# Altium PCB PCB1.PcbDoc
Units mm, origin at the board's own origin, x right, y up, seen from the top; angles counter-clockwise.
Board outline 56 x 70 mm, 2 copper layers (Top Layer, Bottom Layer); 10 components, 0 nets, 48 pads, 0 vias.
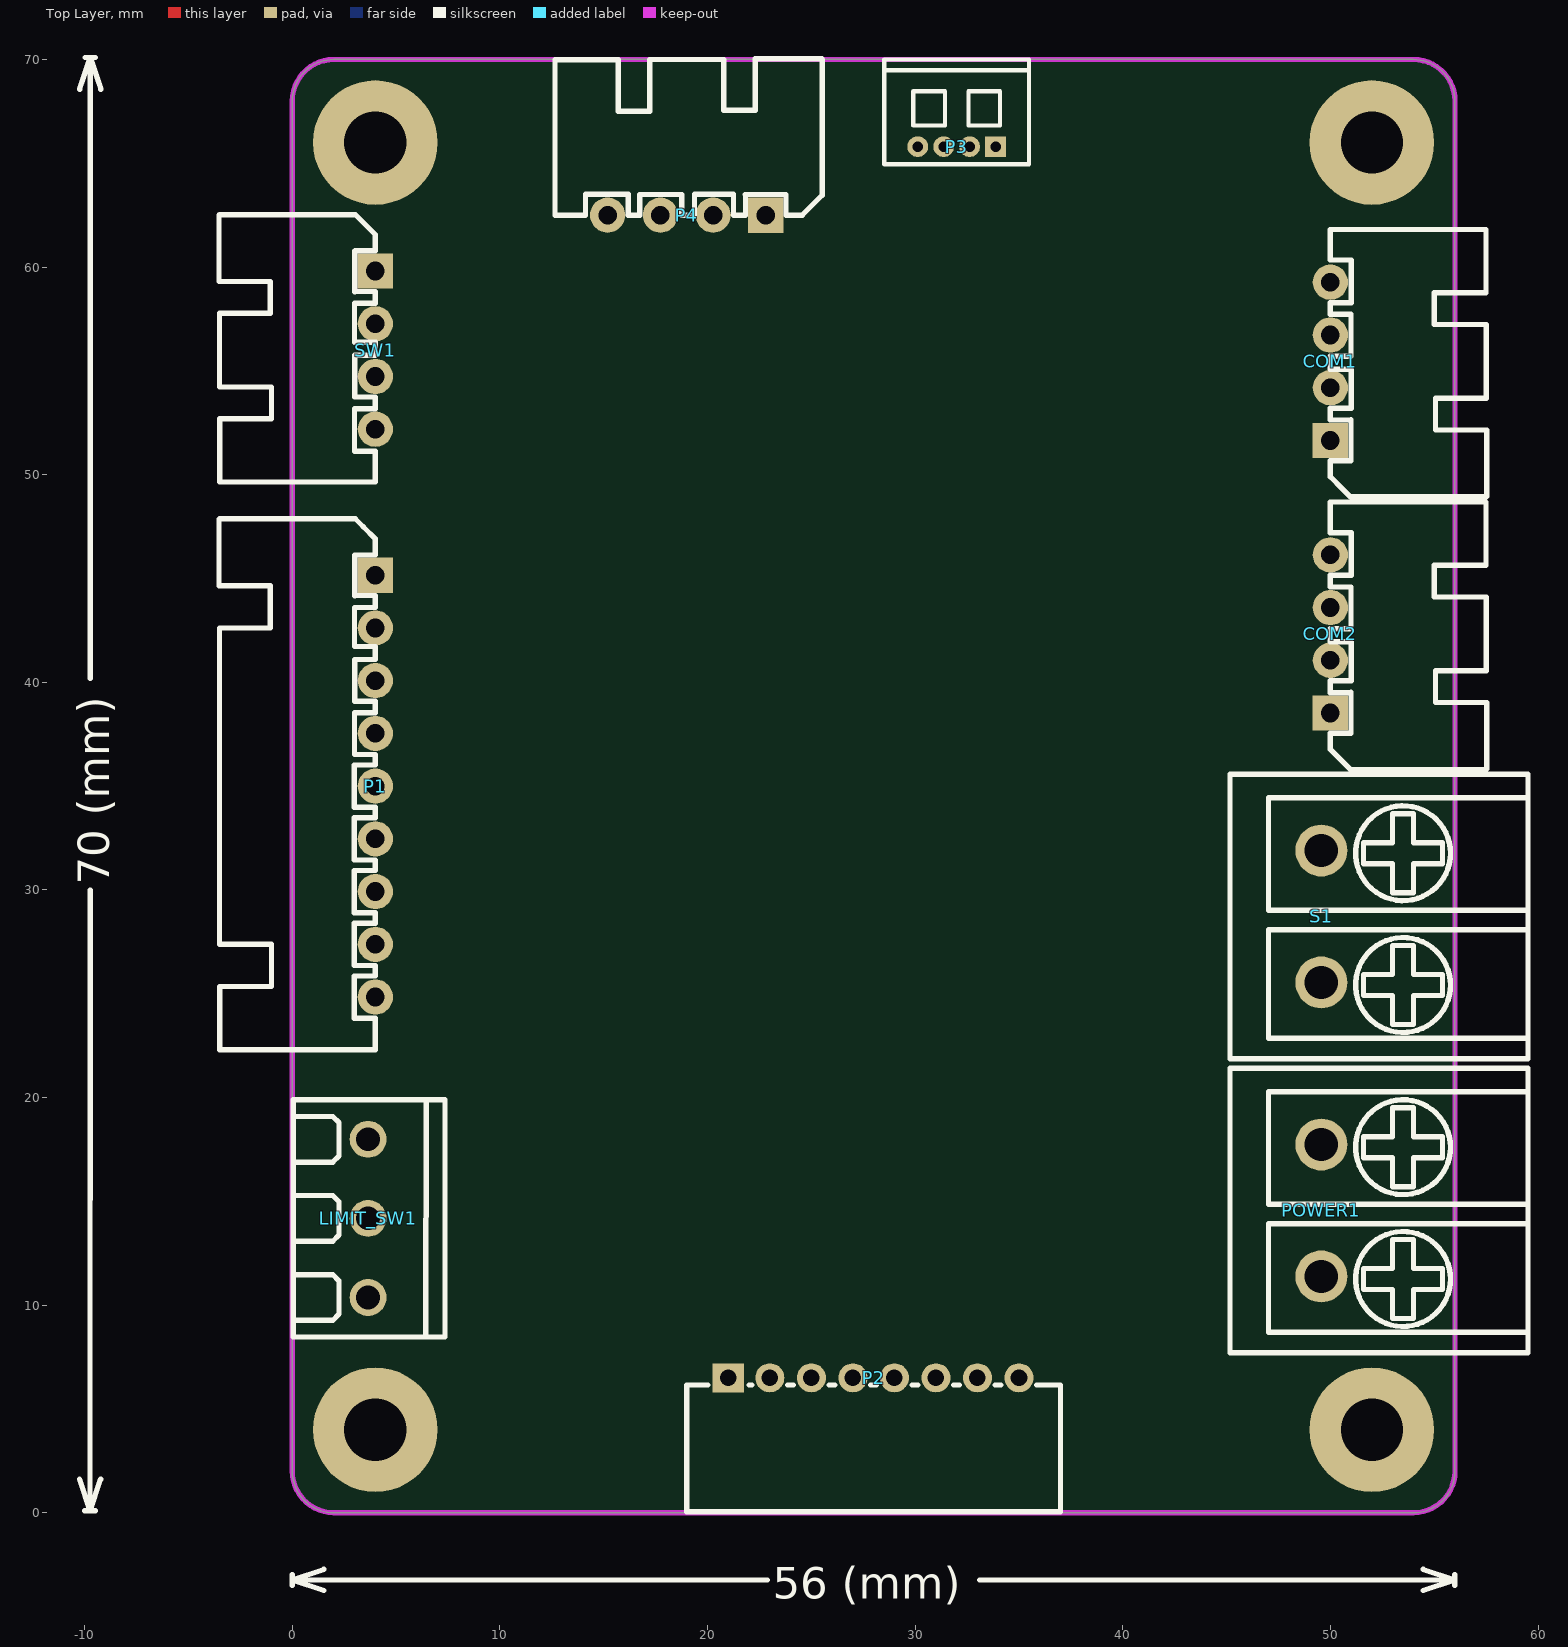
[diagram p0: Top Layer view]
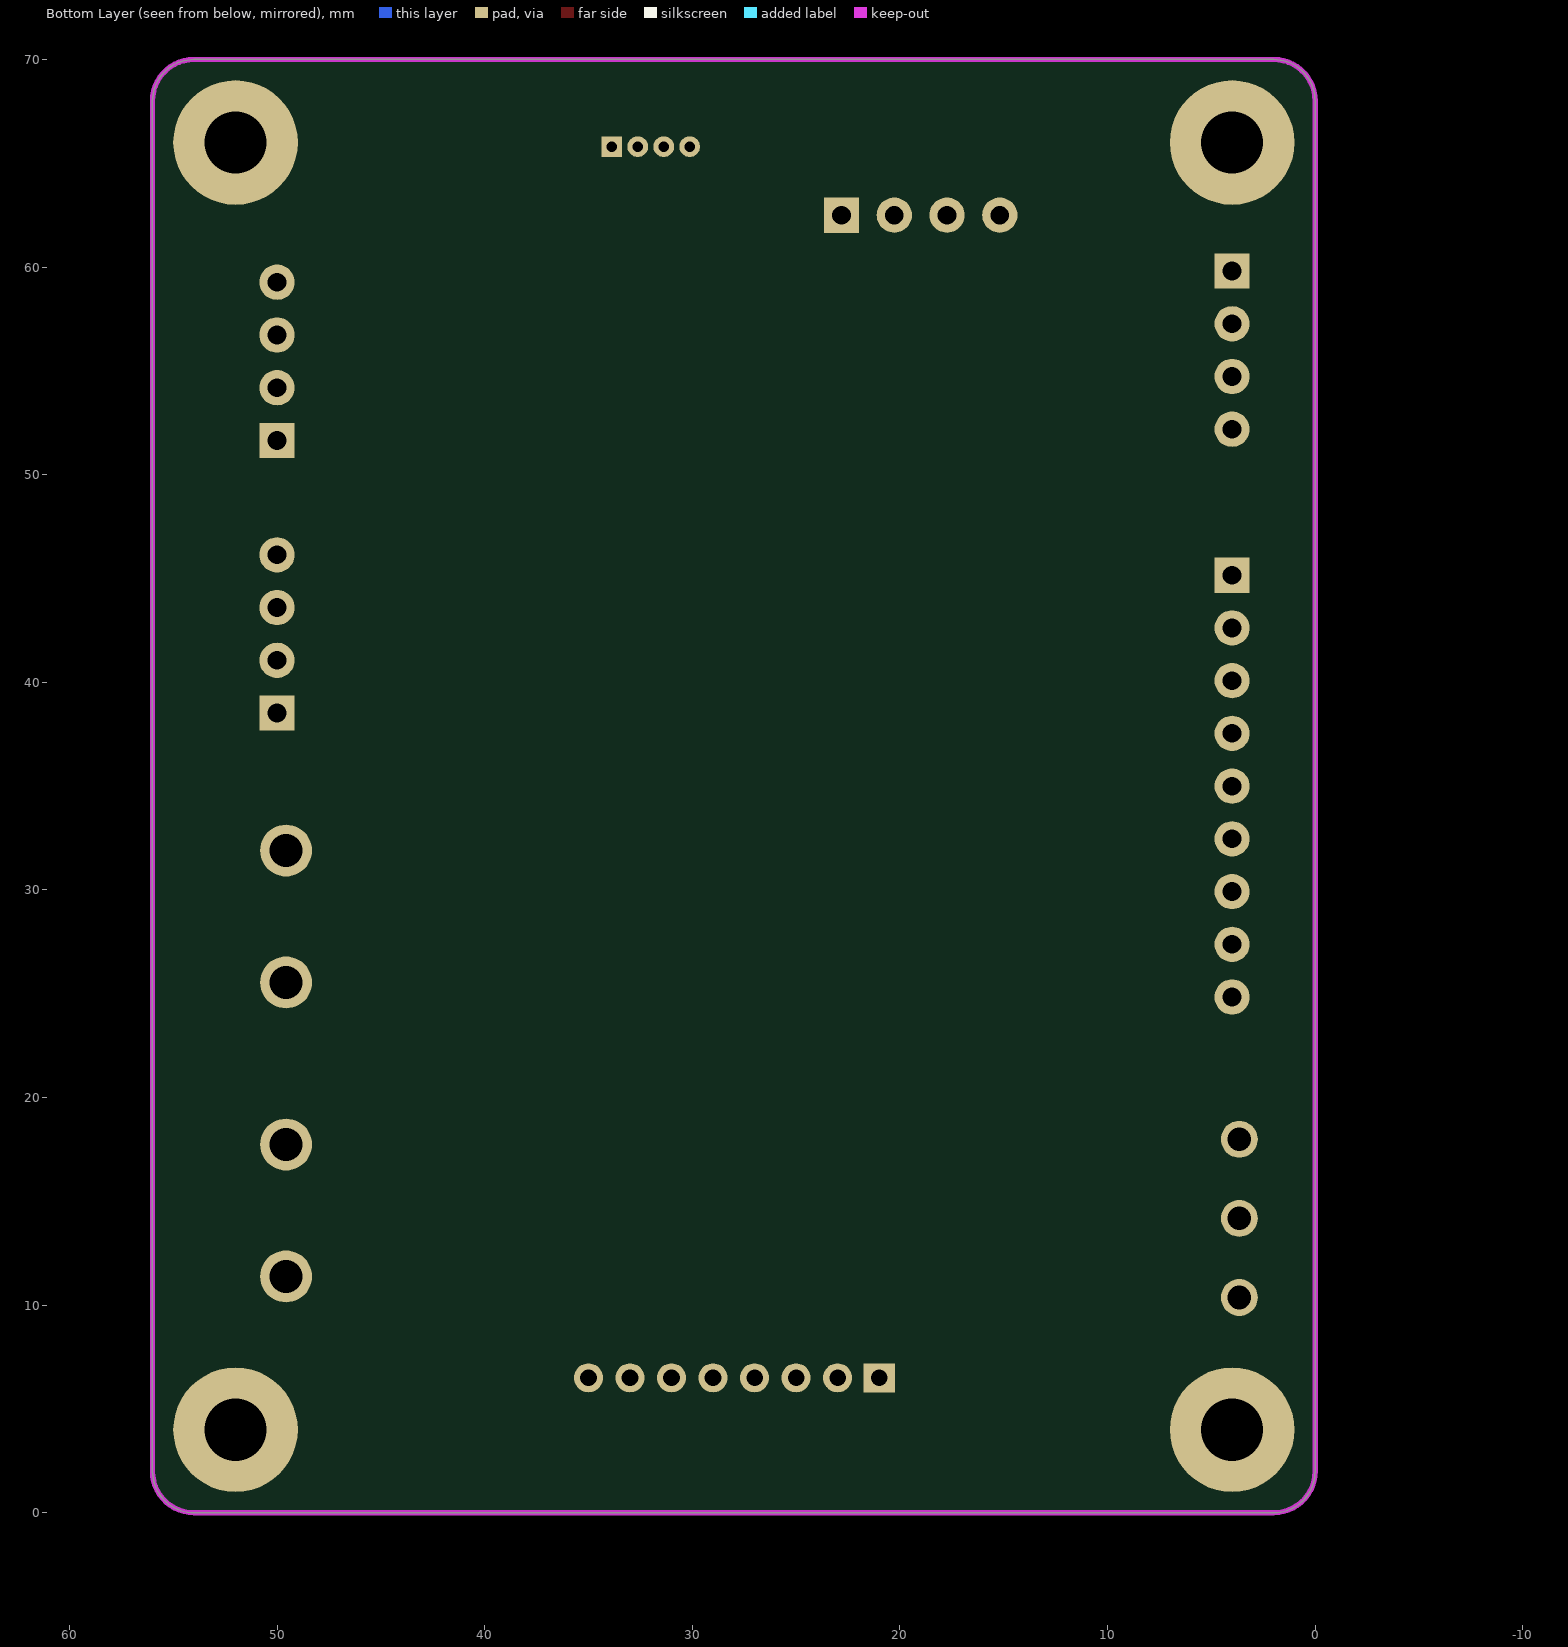
[diagram p1: Bottom Layer view, seen from below]

## Layer stack, top to bottom
Top Solder: solder mask 0.0102, Solder Resist, Dk 3.5
Top Layer: signal copper 0.0356
Dielectric 1: dielectric 0.32, FR-4, Dk 4.8
Bottom Layer: signal copper 0.0356
Bottom Solder: solder mask 0.0102, Solder Resist, Dk 3.5

## Board outline
2,0 cw(c2,2) 0,2 0,60 0,68 cw(c2,68) 2,70 54,70 cw(c54,68) 56,68 56,60 56,2 cw(c54,2) 54,0

## Design rules (kind name [scope] priority, off if disabled: settings)
Clearance [All] p1: gap=0.254 ignorepadtopadclearanceinfootprint=FALSE except(0: Arc-Hole Track-Hole SMDPad-Hole THPad-Hole Via-Hole Fill-Hole Poly-Hole Region-Hole Text-Hole)
PolygonConnect [All] p1: connectstyle=Relief reliefconductorwidth=0.254 reliefentries=4 polygonreliefangle="90 Angle" airgapwidth=0.254
RoutingVias [All] p1: holewidth=0.711 width=1.27 viastyle="Through Hole" minholewidth=0.711 minwidth=1.27 maxholewidth=0.711 maxwidth=1.27
SolderMaskExpansion [All] p1: expansion=0.102 istentingtop=FALSE
Width [All] p1: maxlimit=0.254 minlimit=0.254 preferedwidth=0.254
30 further rules are at their usual default settings.

## Components (designator, comment, footprint, x,y, rotation, side; value= is the part's Value field where it differs from the comment)
COM1 "Header 4" XH2.54-WI-4P 50,55.46 r90 top
COM2 "Header 4" XH2.54-WI-4P 50,42.33 r90 top
LIMIT_SW1 "Header 3" HDR3X1_3.81 3.65,14.18 r180 top
P1 "Header 10" XH2.54-WI-9P 4,35 r270 top
P2 "Header 8" CONN-TH_8P-P2.00_KINGHELM_KH-PH-8P-W 28,6.5 r0 top
P3 "Header 4" "MX 1.25-WI-4P" 32,65.8 r180 top
P4 "Header 4" XH2.54-WI-4P 19,62.5 r180 top
POWER1 "Header 2" CONN-TH_JL635-63502B01 49.563,14.562 r90 top
S1 "SW_SPST" CONN-TH_JL635-63502B01 49.563,28.722 r90 top
SW1 "Header 4" XH2.54-WI-4P 4,56 r270 top

## Footprints (in the part's own frame and the unit in brackets; to place one, negate y for a bottom-side part, rotate by r counter-clockwise, add the part's x,y. Pads: shape width x height; smd on the part's side, far side on the other; paste and mask are expansions set on the pad)
CONN-TH_8P-P2.00_KINGHELM_KH-PH-8P-W [mm]
  rect 1.524x1.4 hole 0.8 paste-2539.97 mask+0.05: 1(-7,0)
  round 1.4 hole 0.8 paste-2539.97 mask+0.05: 2(-5,0) 3(-3,0) 4(-1,0) 5(1,0) 6(3,0) 7(5,0) 8(7,0)
  silkscreen extent -9,-6.45 9,-0.35, body extent -9.12,-6.57 9.12,1.96, height 6.3
CONN-TH_JL635-63502B01 [mm]
  round 2.5 hole 1.6: 1(-3.175,0) 2(3.175,0)
  silkscreen extent -6.85,-9.95 6.85,4.4, body extent -6.95,-9.8 6.95,4.5, height 13
HDR3X1_3.81 [mil]
  round 70 hole 45 mask+2: 1(0,150) 2(0,0) 3(0,-150)
  silkscreen extent -146,-225 142,225, body extent -158,-247 134,223, height 335
"MX 1.25-WI-4P" [mm] "长：6.75mm，宽：1.8mm，高：3.3mm"
  rect 1x1 hole 0.5: 1(-1.875,0)
  round 1 hole 0.5: 2(-0.625,0) 3(0.625,0) 4(1.875,0)
  silkscreen extent -3.49,-4.19 3.49,0.85, body extent -3.37,-4.05 3.37,0.85, height 3.35
XH2.54-WI-4P [mm] "接插件，4P"
  rect 1.7x1.7 hole 0.9: 1(-3.81,0)
  round 1.7 hole 0.9: 2(-1.27,0) 3(1.27,0) 4(3.81,0)
  silkscreen extent -6.53,-7.53 6.35,0, body extent -6.31,-7.35 6.31,0.35, height 5.73
XH2.54-WI-9P [mm] "接插件，9P"
  rect 1.7x1.7 hole 0.9: 1(-10.16,0)
  round 1.7 hole 0.9: 2(-7.62,0) 3(-5.08,0) 4(-2.54,0) 5(0,0) 6(2.54,0) 7(5.08,0) 8(7.62,0) 9(10.16,0)
  silkscreen extent -12.88,-7.53 12.7,0, body extent -12.66,-7.35 12.66,0.35, height 5.75

## Part data
COM1 COM2 LIMIT_SW1 P3 P4 POWER1 SW1: "接插件", LatestRevisionDate=17-Jul-2002, LatestRevisionNote="Re-released for DXP Platform.", Publisher="Altium Limited"
P1: library part "Header 9", "Header, 9-Pin", LatestRevisionDate=17-Jul-2002, LatestRevisionNote="Re-released for DXP Platform.", Publisher="Altium Limited"
P2: "Header, 8-Pin", LatestRevisionDate=17-Jul-2002, LatestRevisionNote="Re-released for DXP Platform.", Publisher="Altium Limited"
S1: "船型开关"

## Free pads (board coordinates)
  round 6 hole 3: 2(4,4) 2(4,66) 2(52,4) 2(52,66)

## Nets (pads, with @x,y where several pads share a name; then routed paths per layer and width w, separated by ;. In a path a pad name is that pad's centre, name@x,y a point inside that pad or via, vN(x,y) a via of type N, cw(c..) or ccw(c..) an arc to the next point about the centre after c; other vN are vias at no path point)
pads on no net: COM1.1 COM1.2 COM1.3 COM1.4 COM2.1 COM2.2 COM2.3 COM2.4 LIMIT_SW1.1 LIMIT_SW1.2 LIMIT_SW1.3 P1.1 P1.2 P1.3 P1.4 P1.5 P1.6 P1.7 P1.8 P1.9 P2.1 P2.2 P2.3 P2.4 P2.5 P2.6 P2.7 P2.8 P3.1 P3.2 P3.3 P3.4 P4.1 P4.2 P4.3 P4.4 POWER1.1 POWER1.2 S1.1 S1.2 SW1.1 SW1.2 SW1.3 SW1.4

## Keep-outs
Keep-Out Layer:
  the board outline again, w0.254

## Silkscreen, mask and mechanical layers (free items; w line width, h text height)
Top Overlay:
  lines w0.254: -10.248,1.616 -9.74,0.092 ; -10.24,68.568 -9.732,70.092 ; -9.994,0.092 -9.486,0.092 ; -9.986,70.092 -9.478,70.092 ; -9.737,29.989 -9.74,0.092 ; -9.735,40.196 -9.732,70.092 ; -9.232,1.616 -9.74,0.092 ; -9.224,68.568 -9.732,70.092 ; -0.008,-3.487 -0.008,-2.979 ; 1.516,-3.741 -0.008,-3.233 ; 1.516,-2.725 -0.008,-3.233 ; 22.888,-3.233 -0.008,-3.233 ; 33.096,-3.233 55.992,-3.233 ; 54.468,-3.741 55.992,-3.233 ; 54.468,-2.725 55.992,-3.233 ; 55.992,-3.487 55.992,-2.979
  text "70 (mm)" at -8.822,30.242 h1.52 r89.99
  text "56 (mm)" at 23.142,-4.148 h1.52